# Altium PCB PCB_wordclocksmall_2022-11-27.pcbdoc (part 4 of 4)
Units mm, origin at the board's own origin, x right, y up, seen from the top; angles counter-clockwise.
Board outline 250.51 x 237.35 mm, 2 copper layers (Top Layer, Bottom Layer); 318 components, 218 nets, 1024 pads, 203 vias.
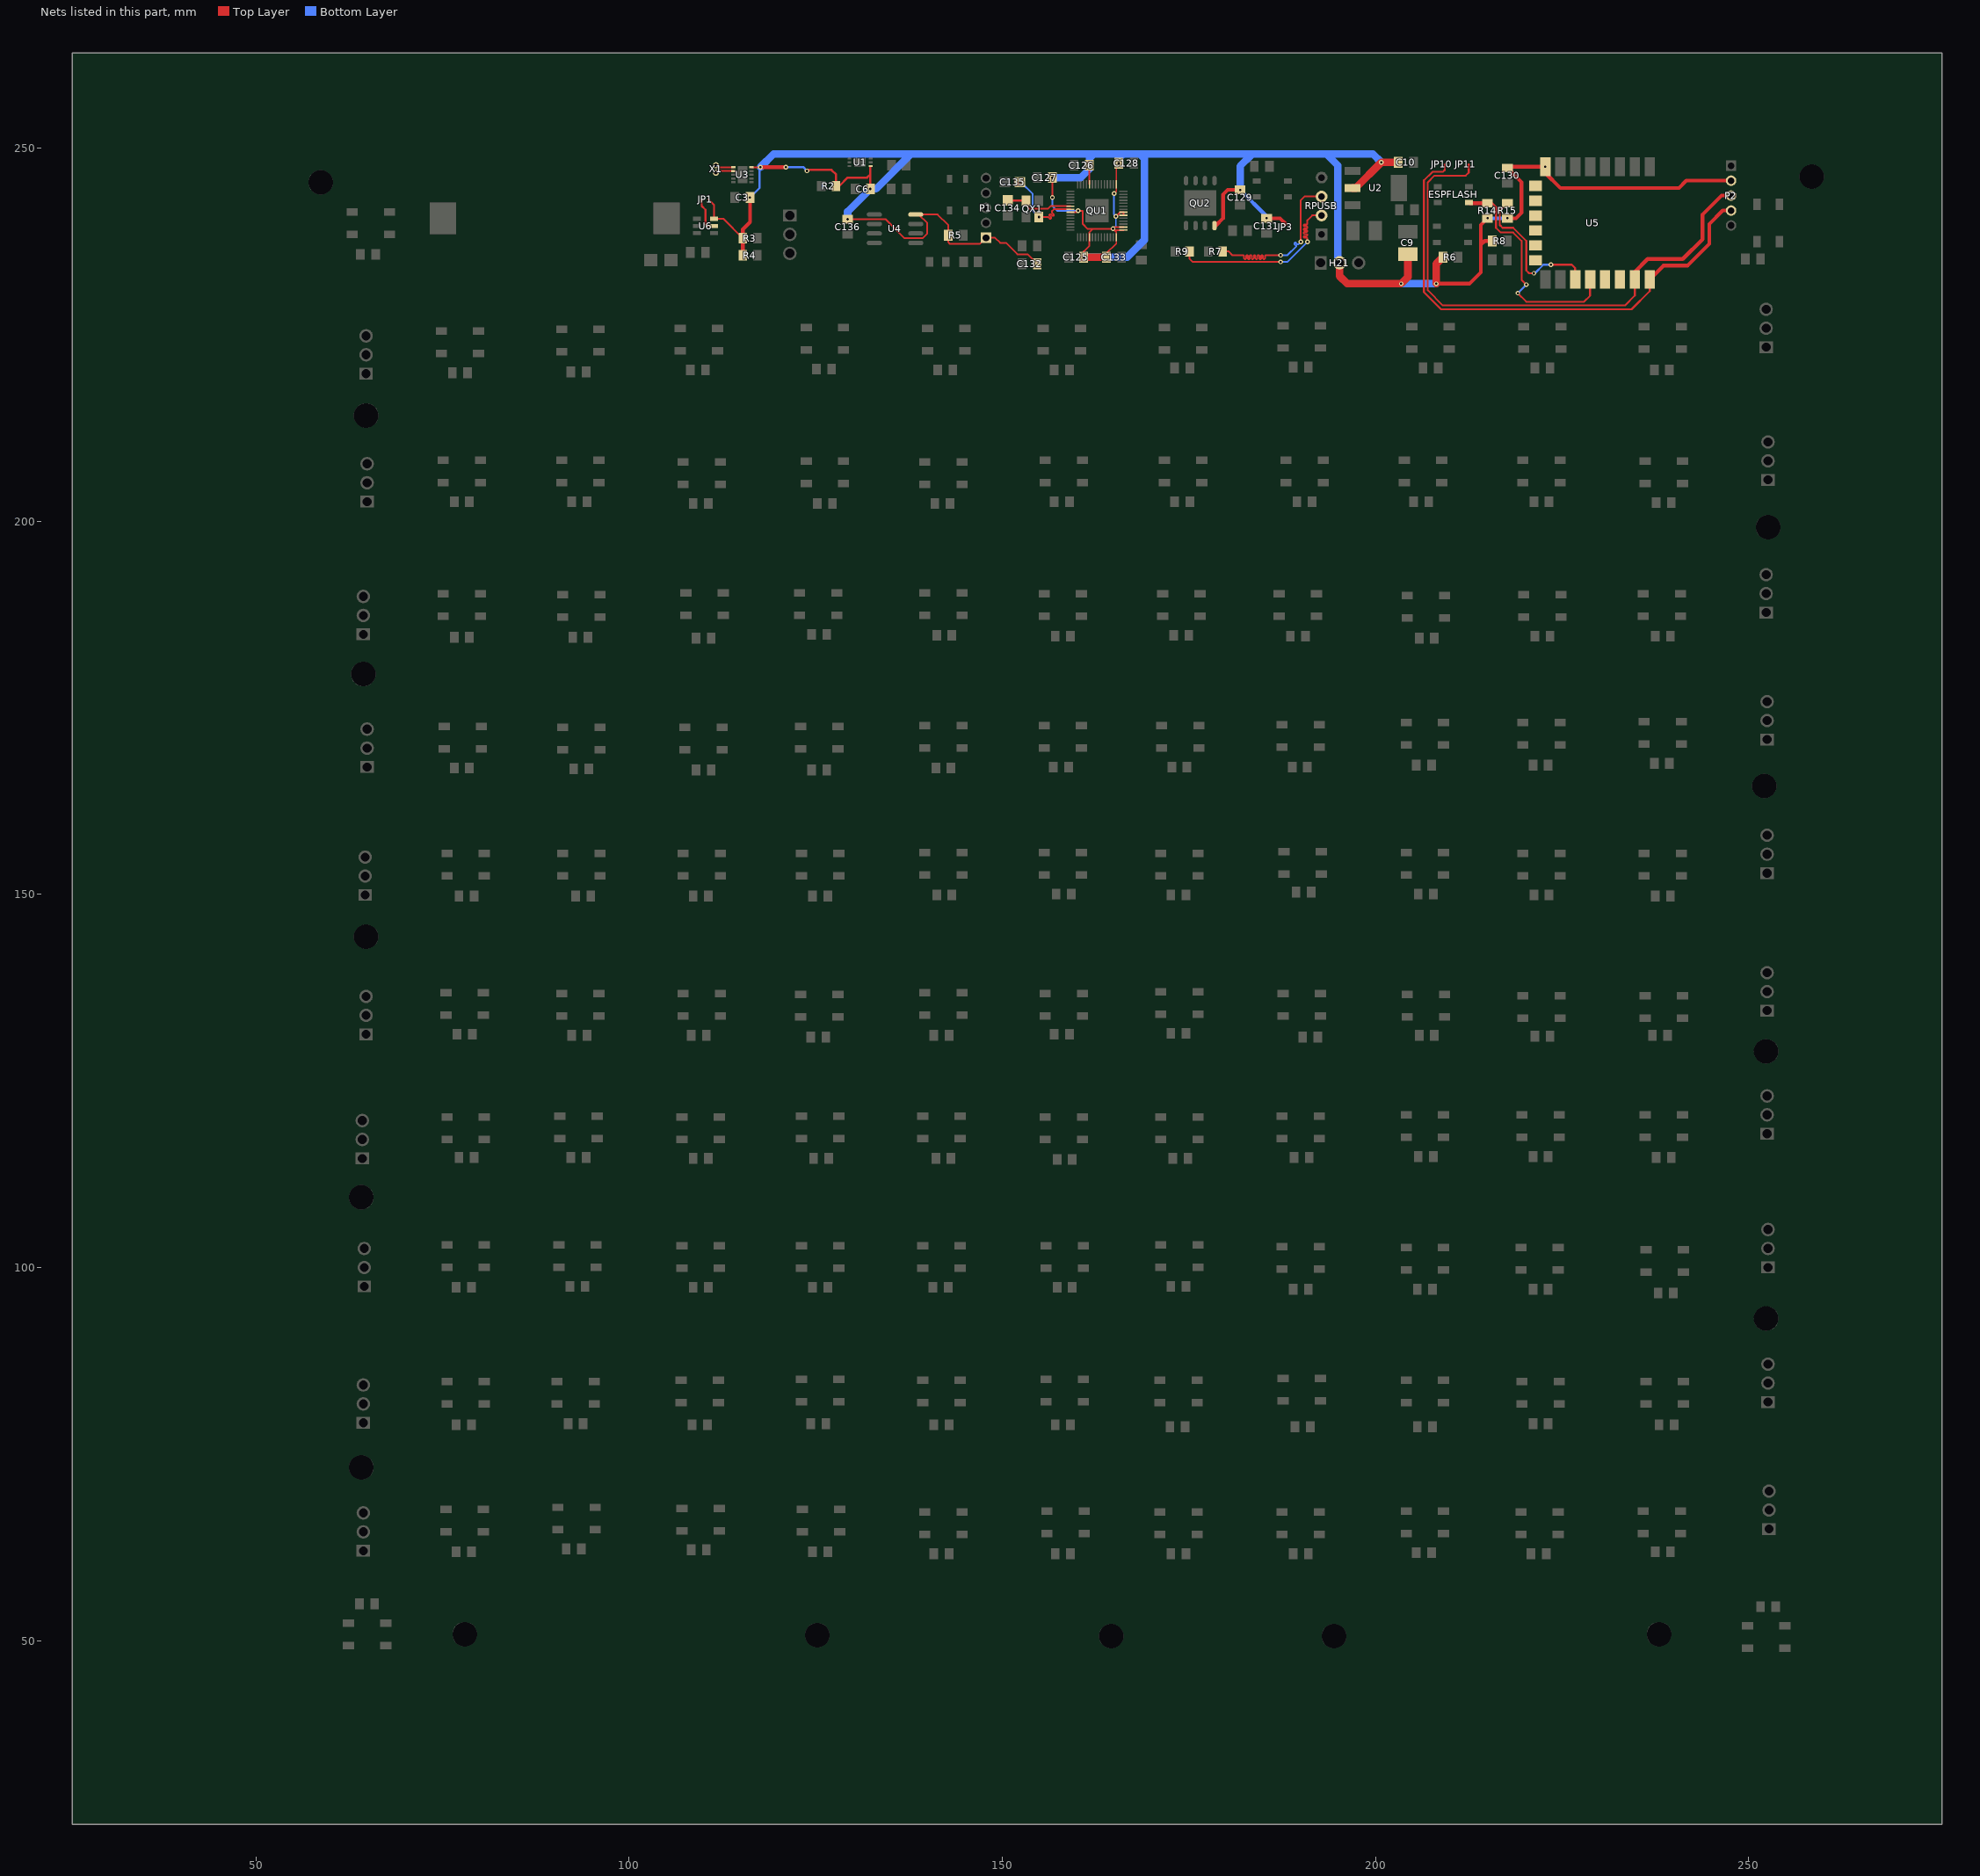
[diagram p4: the nets of this part, all layers, seen from the top]

## Via types
v1: diameter 0.635, hole 0.305, Top Layer to Bottom Layer, tented both sides, 165 vias
v2: diameter 0.61, hole 0.305, Top Layer to Bottom Layer, tented both sides, 37 vias
v3: diameter 1, hole 0.5, Top Layer to Bottom Layer, tented both sides, 1 vias

## Nets (pads, with @x,y where several pads share a name; then routed paths per layer and width w, separated by ;. In a path a pad name is that pad's centre, name@x,y a point inside that pad or via, vN(x,y) a via of type N, cw(c..) or ccw(c..) an arc to the next point about the centre after c; other vN are vias at no path point) (continued)
U5_11: R15.2 U5.11 | length 20.6
  Top Layer w0.254: R15.2@217.68,242.625 216.664,241.609 216.664,239.704 217.045,239.323 218.442,239.323 220.22,237.545 220.22,233.608 220.601,233.227 v2(221.236,233.227) ; v2(223.522,234.37) 226.316,234.37 226.761,233.925 U5.11@226.761,232.406
  Bottom Layer w0.254: v2(221.236,233.227) 221.363,233.227 222.506,234.37 v2(223.522,234.37)
U5_12: ESPFLASH.4 R14.2 U5.12 | length 31.2
  Top Layer w0.254: R14.2@215.013,242.625 215.648,242.625 216.156,242.117 216.156,239.323 216.791,238.688 218.442,238.688 219.585,237.545 219.585,232.338 v2(220.22,231.703) ; v2(219.077,230.56) 220.22,229.417 227.967,229.417 228.761,230.21 U5.12@228.761,232.407
  Top Layer w0.508: ESPFLASH.4@212.541,242.693 212.61,242.625 R14.2@215.013,242.625
  Bottom Layer w0.254: v2(219.077,230.56) v2(220.22,231.703)
U5_13: U5.13
U5_14: U5.14
U5_15: JP11.1 P2.3 U5.15 | length 73
  Top Layer w0.254: JP11.1@212.499,247.832 212.499,246.714 212.092,246.308 207.901,246.308 207.012,245.419 207.012,230.941 209.044,228.909 233.428,228.909 234.762,230.242 U5.15@234.761,232.408
  Top Layer w0.508: U5.15@234.761,232.408 234.761,233.416 236.476,235.132 241.175,235.132 243.842,237.799 243.842,241.101 246.382,243.641 P2.3@247.652,243.641
U5_16: JP10.1 P2.4 U5.16 | length 69.2
  Top Layer w0.254: JP10.1@209.324,247.832 209.298,247.807 209.298,247.07 209.044,246.816 207.647,246.816 206.504,245.673 206.504,230.687 208.79,228.401 234.317,228.401 236.761,230.844 U5.16@236.761,232.407
  Top Layer w0.508: U5.16@236.761,232.407 238.597,234.243 241.81,234.243 244.731,237.164 244.731,239.831 246.542,241.642 P2.4@247.652,241.642
U5_17: U5.17
U5_18: U5.18
U5_19: U5.19
U5_20: U5.20
U5_21: U5.21
U5_22: U5.22
U6_5: JP1.2 U6.5 | length 4.8
  Top Layer w0.254: JP1.2@109.832,243.133 109.73,243.031 109.73,242.244 110.238,241.736 110.238,239.831 110.492,239.577 U6.5@111.387,239.577
USB_D+: R7.2 RPUSB.3 | length 25.7
  Top Layer w0.229: R7.2@179.531,236.148 180.342,236.148 180.85,235.64 182.321,235.64 182.407,235.556 182.407,235.216 182.491,235.132 182.575,235.132 182.661,235.216 182.661,235.556 182.745,235.64 182.829,235.64 182.915,235.556 182.915,235.216 182.999,235.132 183.083,235.132 183.169,235.216 183.169,235.556 183.253,235.64 183.337,235.64 183.423,235.556 183.423,235.216 183.507,235.132 183.591,235.132 183.677,235.216 183.677,235.556 183.761,235.64 183.845,235.64 183.931,235.556 183.931,235.216 184.015,235.132 184.099,235.132 184.185,235.216 184.185,235.556 184.269,235.64 184.353,235.64 184.439,235.556 184.439,235.216 184.523,235.132 184.607,235.132 184.693,235.216 184.693,235.556 184.777,235.64 184.861,235.64 184.947,235.556 184.947,235.216 185.031,235.132 185.115,235.132 185.201,235.216 185.201,235.556 185.285,235.64 v1(187.327,235.64) ; v1(189.994,237.418) 189.994,243.006 190.502,243.514 RPUSB.3@192.788,243.514
  Bottom Layer w0.229: v1(187.327,235.64) 188.216,235.64 189.375,236.798 189.375,236.918 189.136,237.156 189.136,237.276 189.194,237.337 189.314,237.337 189.555,237.098 189.674,237.098 v1(189.994,237.418)
USB_D-: R9.2 RPUSB.2 | length 26.4
  Top Layer w0.229: R9.2@175.086,236.148 175.086,235.182 175.516,234.751 v1(187.327,234.751) ; v1(190.883,237.418) 190.883,237.901 190.8,237.987 190.459,237.987 190.375,238.071 190.375,238.155 190.459,238.241 190.8,238.241 190.883,238.325 190.883,238.409 190.8,238.495 190.459,238.495 190.375,238.579 190.375,238.663 190.459,238.749 190.8,238.749 190.883,238.833 190.883,238.917 190.8,239.003 190.459,239.003 190.375,239.087 190.375,239.171 190.459,239.257 190.8,239.257 190.883,239.341 190.883,239.425 190.8,239.511 190.459,239.511 190.375,239.595 190.375,239.679 190.459,239.765 190.8,239.765 190.883,239.849 190.883,240.339 191.518,240.974 RPUSB.2@192.788,240.974
  Bottom Layer w0.229: v1(187.327,234.751) 188.216,234.751 v1(190.883,237.418)
VCC: C3.1 C6.2 C9.1 C10.2 C125.2 C126.2 C127.2 C128.2 C129.1 C130.1 C131.2 C132.2 C133.2 C136.1 H21.2 JP1.1 JP3.2 P1.1 P2.2 QU1.1 QU1.10 QU1.22 QU1.33 QU1.42 QU1.43 QU1.44 QU1.48 QU1.49 QU2.8 R2.2 R3.1 R4.1 R5.2 R6.2 R8.2 R14.1 R15.1 U1.1 U2.2 U3.10 U4.8 U5.8 U6.6 | length 378.6
  Top Layer w0.229: U4.8@138.411,241.101 141.353,241.101 142.75,239.704 R5.2@142.75,238.307 142.75,237.418 143.004,237.164 147.004,237.164 P1.1@147.83,237.99 ; P1.1@147.83,237.99 149.037,237.989 149.735,237.291 150.497,237.291 152.021,235.767 153.418,235.767 C132.2@154.688,234.497 ; v1(156.72,243.387) v1(156.72,246.054) ; QU1.22@159.139,241.409 159.949,241.409 v1(160.149,241.609) 160.784,241.609 160.784,239.831 161.419,239.196 162.181,239.196 ; v1(160.911,235.386) 160.911,236.148 161.689,236.926 QU1.33@161.689,238.059 161.689,238.704 162.181,239.196 ; v1(161.673,247.705) 161.673,245.175 QU1.10@161.689,245.159 ; C133.2@163.959,235.386 163.959,235.894 165.289,237.224 QU1.42@165.289,238.059 165.289,238.755 v1(164.848,239.196) ; v1(164.975,243.895) 165.289,244.209 QU1.1@165.289,245.159 165.289,247.638 v1(165.61,247.959) ; v1(165.229,240.847) 165.791,241.409 QU1.49@166.239,241.409 QU1.48@166.239,241.009 ; 165.289,238.748 164.848,239.189 v1(164.848,239.196) ; QU1.43@166.239,239.009 165.035,239.009 v1(164.848,239.196) ; QU1.44@166.239,239.409 165.061,239.409 v1(164.848,239.196) ; 162.181,239.196 v1(164.848,239.196)
  Top Layer w0.254: JP1.1@110.645,243.133 111.387,242.39 U6.6@111.387,240.527 112.64,240.527 R3.1@115.241,237.926 ; U3.10@116.409,247.435 117.588,247.435 v2(117.604,247.451) ; v2(129.288,240.466) 131.066,240.466 134.368,240.466 136.908,237.926 139.321,237.926 139.956,238.561 139.956,239.958 138.813,241.101 U4.8@138.411,241.101
  Top Layer w0.3: v1(123.827,246.943) 123.954,247.07 127.129,247.07 127.748,246.451 R2.2@127.748,244.911 ; R2.2@127.715,244.911 128.145,244.911 129.288,246.054 131.888,246.054 132.336,246.502 ; v1(132.336,244.53) 132.336,247.555 U1.1@132.367,247.586
  Top Layer w0.5: R4.1@115.241,235.64 R3.1@115.241,237.926 115.241,239.119 116.207,240.085 v2(116.207,243.387)
  Top Layer w0.508: v2(117.604,247.451) v1(121.033,247.451) ; QU2.8@178.437,239.612 178.6,239.612 179.58,240.593 179.58,243.768 180.215,244.403 v2(181.866,244.403) ; v2(185.422,240.593) 187.226,240.593 JP3.2@187.962,239.856 ; v2(208.155,231.83) 212.6,231.83 214.124,233.354 214.124,237.037 ; v2(215.013,240.593) 214.124,239.704 214.124,237.037 ; R8.2@215.648,237.545 214.632,237.545 214.124,237.037 ; v2(217.68,240.593) 218.823,240.593 219.585,241.355 219.585,245.419 C130.1@217.68,247.324 217.865,247.509 U5.8@222.761,247.509 222.76,246.689 224.792,244.657 240.667,244.657 241.65,245.64 P2.2@247.652,245.641
  Top Layer w1: v1(160.911,235.386) C133.2@163.959,235.386
  Top Layer w1.016: H21.2@195.201,234.624 195.201,232.846 196.217,231.83 v2(203.456,231.83) 204.345,232.719 C9.1@204.345,235.79 ; U2.2@196.929,244.644 197.348,244.644 v2(200.789,248.086) C10.2@203.075,248.086 ; v2(208.155,231.83) 208.155,234.497 R6.2@209.044,235.386
  Bottom Layer w0.229: v1(156.72,243.387) 156.72,242.244 157.355,241.609 v1(160.149,241.609) ; v1(164.848,239.196) 165.229,239.577 v1(165.229,240.847) 164.975,241.101 v1(164.975,243.895)
  Bottom Layer w0.254: v2(116.207,243.387) 117.477,244.657 117.477,247.324 v2(117.604,247.451)
  Bottom Layer w0.3: v1(121.033,247.451) 123.319,247.451 v1(123.827,246.943)
  Bottom Layer w0.508: v2(181.866,244.403) 185.422,240.847 v2(185.422,240.593) ; v2(215.013,240.593) v2(217.68,240.593)
  Bottom Layer w1: v2(117.604,247.451) 119.382,249.229 137.797,249.229 ; v1(132.336,244.53) 133.098,244.53 137.797,249.229 ; v1(156.72,246.054) 160.53,246.054 161.673,247.197 v1(161.673,247.705) 161.673,248.594 162.308,249.229 ; v1(160.911,235.386) 166.753,235.386 169.039,237.672 169.039,248.594 168.404,249.229 166.245,249.229 165.61,248.594 v1(165.61,247.959) ; 166.88,249.229 162.308,249.229 ; 167.769,249.229 193.423,249.229 ; v2(181.866,244.403) 181.866,247.578 183.378,249.089 183.378,249.229 ; H21.2@195.201,234.624 194.947,234.878 194.947,247.705 193.423,249.229 ; v2(200.789,248.086) 199.646,249.229 193.423,249.229 ; 137.797,249.229 162.308,249.229
  Bottom Layer w1.016: v2(129.288,240.466) 129.288,241.482 v1(132.336,244.53) ; v2(203.456,231.83) v2(208.155,231.83)
  other v2: 222.76,247.509
X1_1: U3.1 X1.1 | length 2.4
  Top Layer w0.254: X1.1@111.635,247.697 111.897,247.435 U3.1@113.974,247.435
X1_2: U3.2 X1.2 | length 2.4
  Top Layer w0.254: X1.2@111.635,246.697 111.873,246.935 U3.2@113.974,246.935
XIN: C134.1 QU1.20 QX1.1 | length 9.4
  Top Layer w0.229: QX1.1@153.203,242.963 153.202,242.333 153.672,241.863 156.085,241.863 156.466,242.208 QU1.20@159.139,242.209
  Top Layer w0.254: C134.1@150.751,242.99 150.778,242.963 QX1.1@153.203,242.963
XOUT: C135.2 QU1.21 QX1.3 | length 12.1
  Top Layer w0.229: v2(154.904,240.763) 156.146,240.763 156.385,240.547 156.504,240.547 156.565,240.608 156.565,240.728 156.324,240.966 156.324,241.086 156.385,241.147 156.504,241.147 156.743,240.908 156.863,240.908 156.924,240.966 156.924,241.086 156.685,241.327 156.685,241.573 156.921,241.81 QU1.21@159.138,241.81
  Bottom Layer w0.254: v2(152.386,245.419) 152.529,245.419 154.053,243.895 154.053,241.614 v2(154.904,240.763)

## Polygon pours and split planes (outlines as drawn)
GND on Bottom Layer (solid): 53.088,250.054 53.088,40.123 263.019,40.123 263.146,250.054
GND on Top Layer (solid): 52.961,249.102 52.961,39.171 262.892,39.171 263.019,249.102

## Other copper
Top Layer:
  region net QBOOT_2: 184.609,243.773 184.609,243.138 184.728,243.328 184.728,243.582
  region net QBOOT_2: 186.121,246.854 185.486,246.854 185.676,246.473 185.93,246.473
  region net QSPI_SS: 183.192,247.292 183.192,247.864 182.849,247.692 182.849,247.464
  region net QSPI_SS: 178.627,246.205 178.728,245.643 179.071,246.11 179.071,246.433
  region net LED63_4: 186.871,134.182 188.372,133.184 189.29,134.375 188.441,134.94
  region net LED63_4: 208.509,137.055 210.008,137.055 209.758,137.509 208.758,137.509
  region net LED64_4: 203.508,134.055 205.009,133.057 205.927,134.248 205.078,134.813
  region net LED64_4: 224.003,136.928 225.502,136.928 225.292,137.279 224.292,137.279
  region net ESPRST_3: 230.061,248.759 231.231,248.759 230.232,249.483 229.693,249.303
  region net ESPRST_3: 231.396,246.259 230.126,246.259 230.507,246.181 231.015,246.181
  region net ESPRST_3: 237.396,246.259 236.126,246.259 236.507,246.212 237.015,246.212
  region net ESPRST_1: 212.016,244.493 212.016,245.193 211.897,245.097 211.897,244.589
  region net ESPRST_3: 237.461,248.144 237.461,246.874 238.223,247.255 238.223,247.763
  region net ESPRST_3: 248.266,239.305 247.909,240.292 248.453,240.229 248.644,239.701
  region net U5_15: 247.189,243.116 247.189,244.166 246.699,243.895 246.699,243.387
  region net U5_15: 234.367,233.658 235.461,233.658 236.123,234.42 235.405,234.42
  region net U5_16: 237.461,233.657 237.461,232.472 238.223,233.51 238.223,234.229
  region net U5_16: 247.189,241.116 247.189,242.166 246.699,241.895 246.699,241.387
  region net VCC: 247.189,245.116 247.189,246.166 246.699,245.895 246.699,245.387
  rectangle: 86.87,42.219 116.207,49.839
  rectangle: 131.447,41.838 160.784,49.458
Bottom Layer:
  rectangle: 86.807,42.219 116.144,49.839
  rectangle: 131.384,41.838 160.721,49.458

## Silkscreen, mask and mechanical layers (free items; w line width, h text height)
Top Overlay:
  text "GND 3v3 RX TX RST" at 245.43,248.34 h0.64 r270
  text "GND SWCLK SWD RUN 3V3" at 145.802,246.816 h0.5 r270
  text "GND SDA SCL" at 118.855,242.244 h0.8 r270
  text "GP16" at 125.674,238.561 h0.9 r90
  text "GND 3V3 5V" at 198.63,237.437 h0.8 r180
  text "5V D- D+ GND" at 191.841,237.164 h0.9 r90
  text "GP22" at 125.547,234.624 h0.9 r90
  text "GP25" at 127.256,233.539 h0.9
  text "5V DOUT GND" at 251.073,220.781 h1 r90
  text "5V DIN GND" at 68.066,217.987 h1 r90
  text "5V DIN GND" at 251.2,203.89 h1 r90
  text "5V DOUT GND" at 68.32,200.207 h1 r90
  text "5V DOUT GND" at 251.2,185.856 h1 r90
  text "5V DIN GND" at 68.066,183.316 h1 r90
  text "5V DIN GND" at 251.2,168.838 h1 r90
  text "5V DOUT GND" at 68.32,164.901 h1 r90
  text "5V DOUT GND" at 251.073,150.804 h1 r90
  text "5V DIN GND" at 67.812,148.518 h1 r90
  text "5V DIN GND" at 251.073,132.77 h1 r90
  text "5V DOUT GND" at 68.066,128.96 h1 r90
  text "5V DOUT GND" at 250.692,115.244 h1 r90
  text "5V DIN GND" at 67.685,112.958 h1 r90
  text "5V DIN GND" at 251.2,98.226 h1 r90
  text "5V DOUT GND" at 67.939,95.305 h1 r90
  text "5V DOUT GND" at 251.2,79.557 h1 r90
  text "5V DIN GND" at 67.685,77.398 h1 r90
  text "5V DIN GND" at 251.454,63.682 h1 r90
  text "5V DOUT GND" at 67.812,59.491 h1 r90
  text "HW VERSION" at 88.521,49.101 h3
  text "SW VERSION" at 132.971,48.466 h3
  text "PCB V2" at 87.886,46.045 h2
  text "Makerspace FH Aachen" at 218.569,42.612 h1.5
  text "01.12.2022" at 100.459,41.854 h2
  text "JLCJLCJLCJLC" at 55.374,41.088 h1.5
  text "CLOCK WITH WORDS" at 163.832,41.1 h3
  text "Marcel Ochsendorf info@marcelochsendorf.com" at 218.442,40.832 h1.25
Bottom Overlay:
  text "GND 3v3 RX TX RST" at 246.7,248.34 h0.64 r90
  text "GND SWCLK SWD RUN 3V3" at 146.81,246.689 h0.5 r90
  text "GND SDA SCL" at 120.417,242.244 h0.8 r90
  text "5V D- D+ GND" at 189.925,237.164 h0.9 r270
  text "GND 3V3 5V" at 198.757,235.748 h0.8
  text "5V DIN GND" at 65.923,217.987 h1 r270
  text "5V DIN GND" at 249.438,203.89 h1 r270
  text "5V DIN GND" at 65.796,183.189 h1 r270
  text "5V DIN GND" at 249.438,168.838 h1 r270
  text "5V DIN GND" at 65.796,148.518 h1 r270
  text "5V DIN GND" at 249.311,132.897 h1 r270
  text "5V DIN GND" at 65.796,112.958 h1 r270
  text "5V DIN GND" at 249.311,98.353 h1 r270
  text "5V DIN GND" at 65.542,77.398 h1 r270
  text "5V DIN GND" at 249.438,63.682 h1 r270
  text "HW VERSION" at 114.937,48.974 h3
  text "SW VERSION" at 159.387,48.339 h3
  text "PCB V2" at 100.332,46.426 h2
  text "Makerspace FH Aachen" at 243.461,42.485 h1.5
  text "01.12.2022" at 112.905,42.235 h2
  text "CLOCK WITH WORDS" at 207.012,41.1 h3
  text "Marcel Ochsendorf info@marcelochsendorf.com" at 261.114,40.832 h1.25
Top Solder:
  rectangle: 86.756,42.168 116.195,49.89
  rectangle: 131.397,41.787 160.835,49.509
Bottom Solder:
  rectangle: 86.756,42.168 116.195,49.89
  rectangle: 131.333,41.787 160.772,49.509